# Altium PCB PCB.PcbDoc
Units mm, origin at the board's own origin, x right, y up, seen from the top; angles counter-clockwise.
Board outline 28.4 x 26.4 mm, 2 copper layers (Top Layer, Bottom Layer), stack 1.18 mm thick; 3 components, 4 nets, 28 pads, 5 vias.
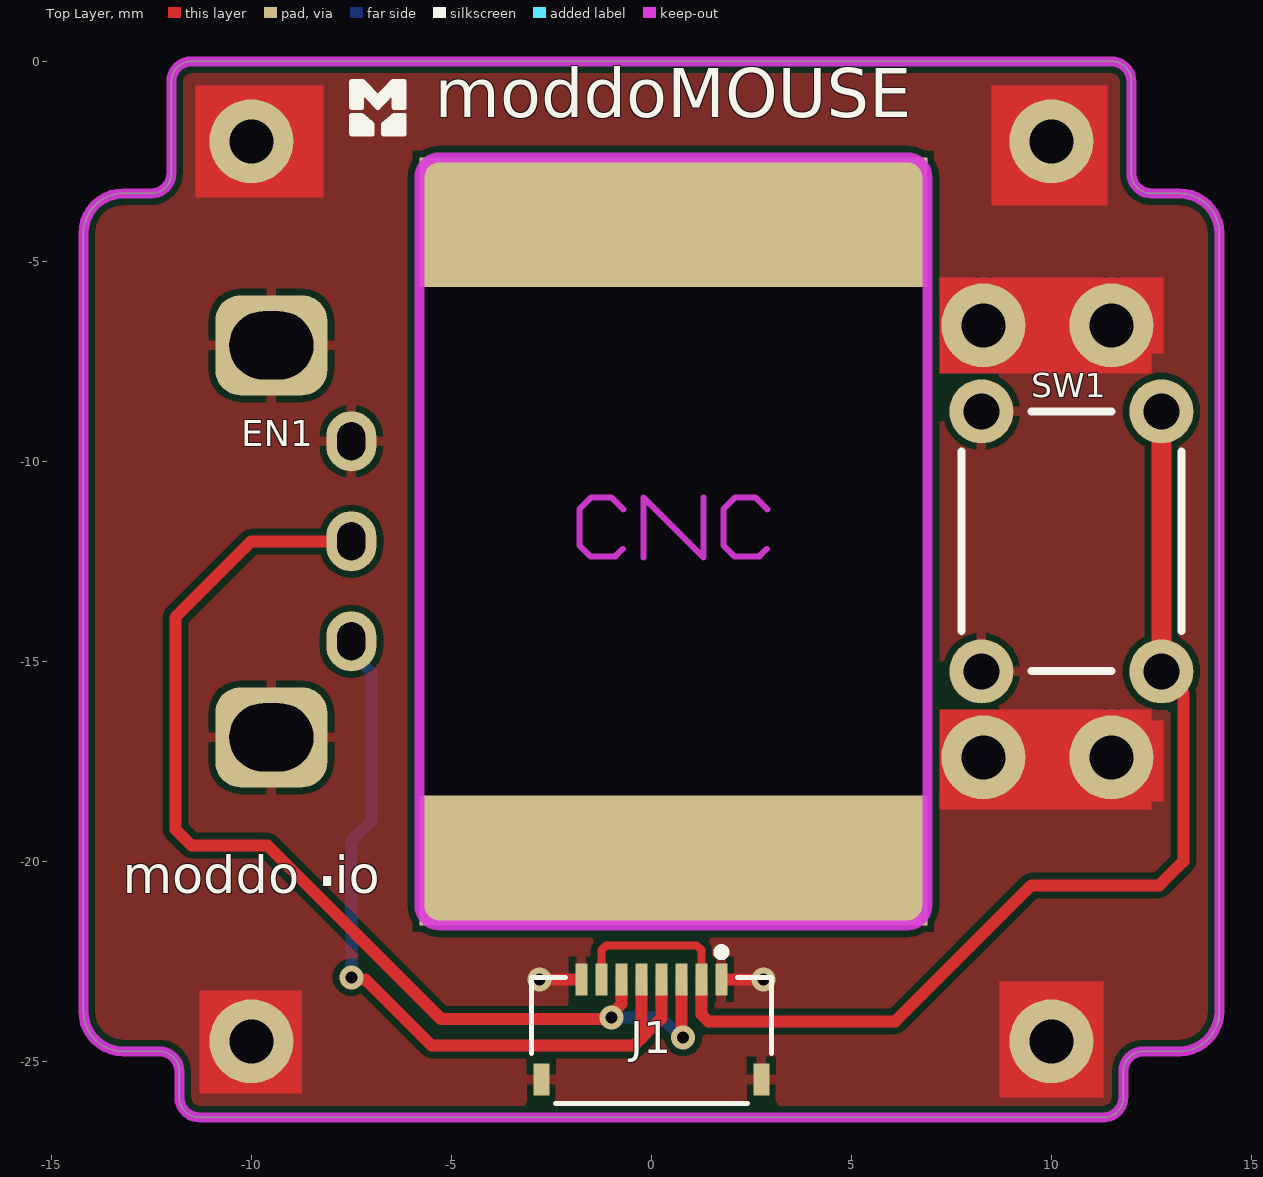
[diagram p0: Top Layer view]
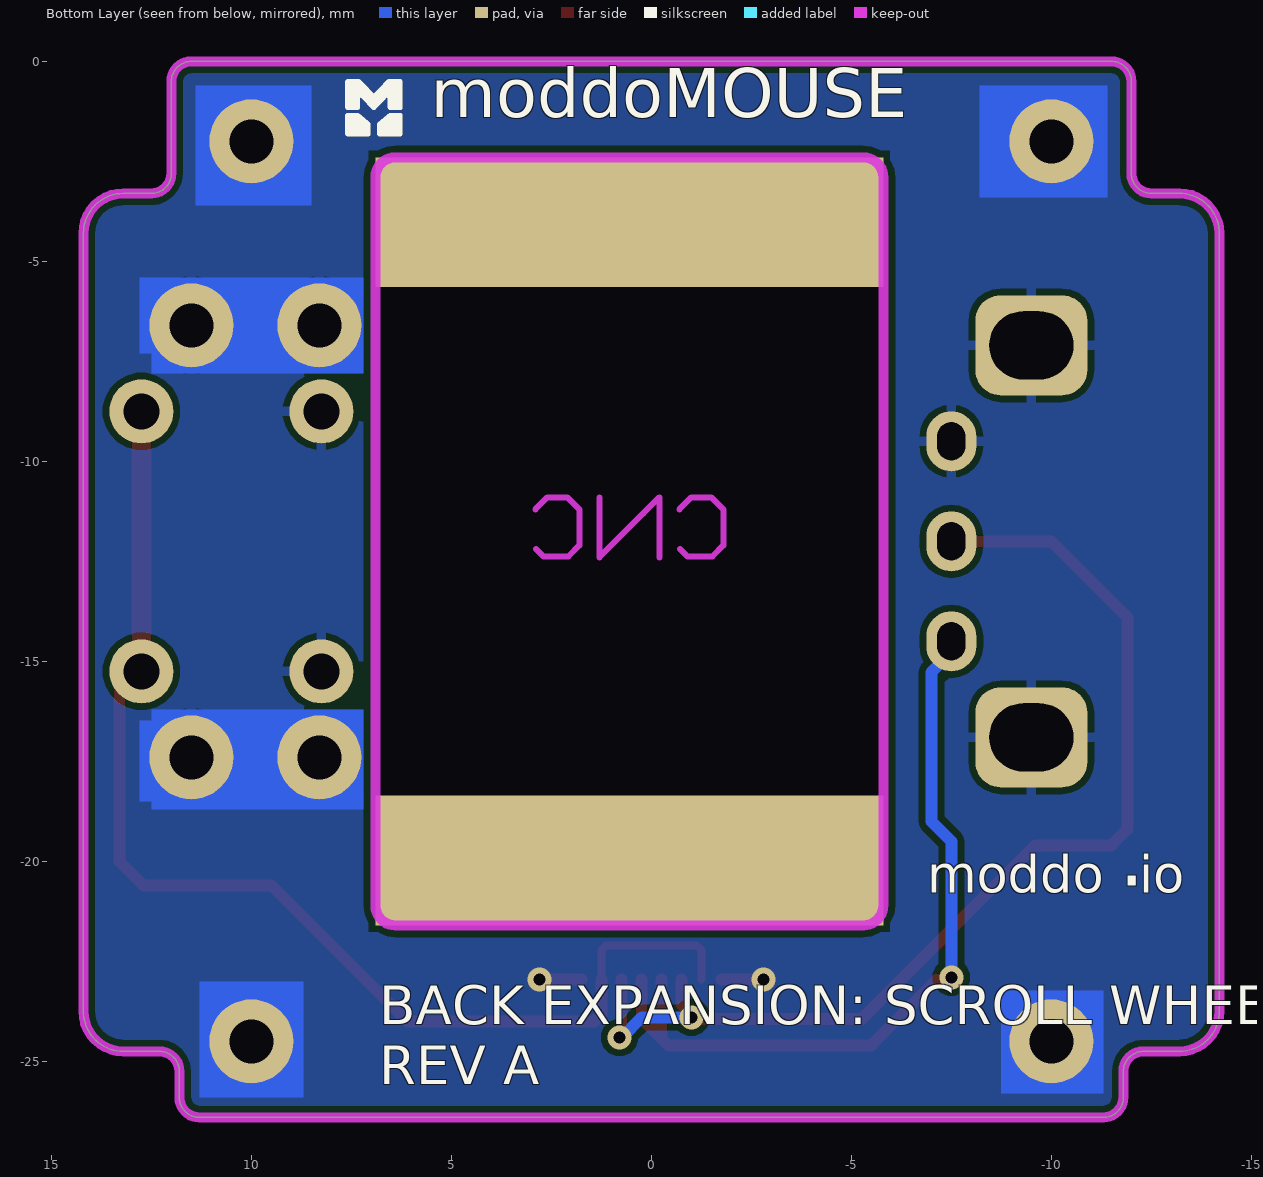
[diagram p1: Bottom Layer view, seen from below]
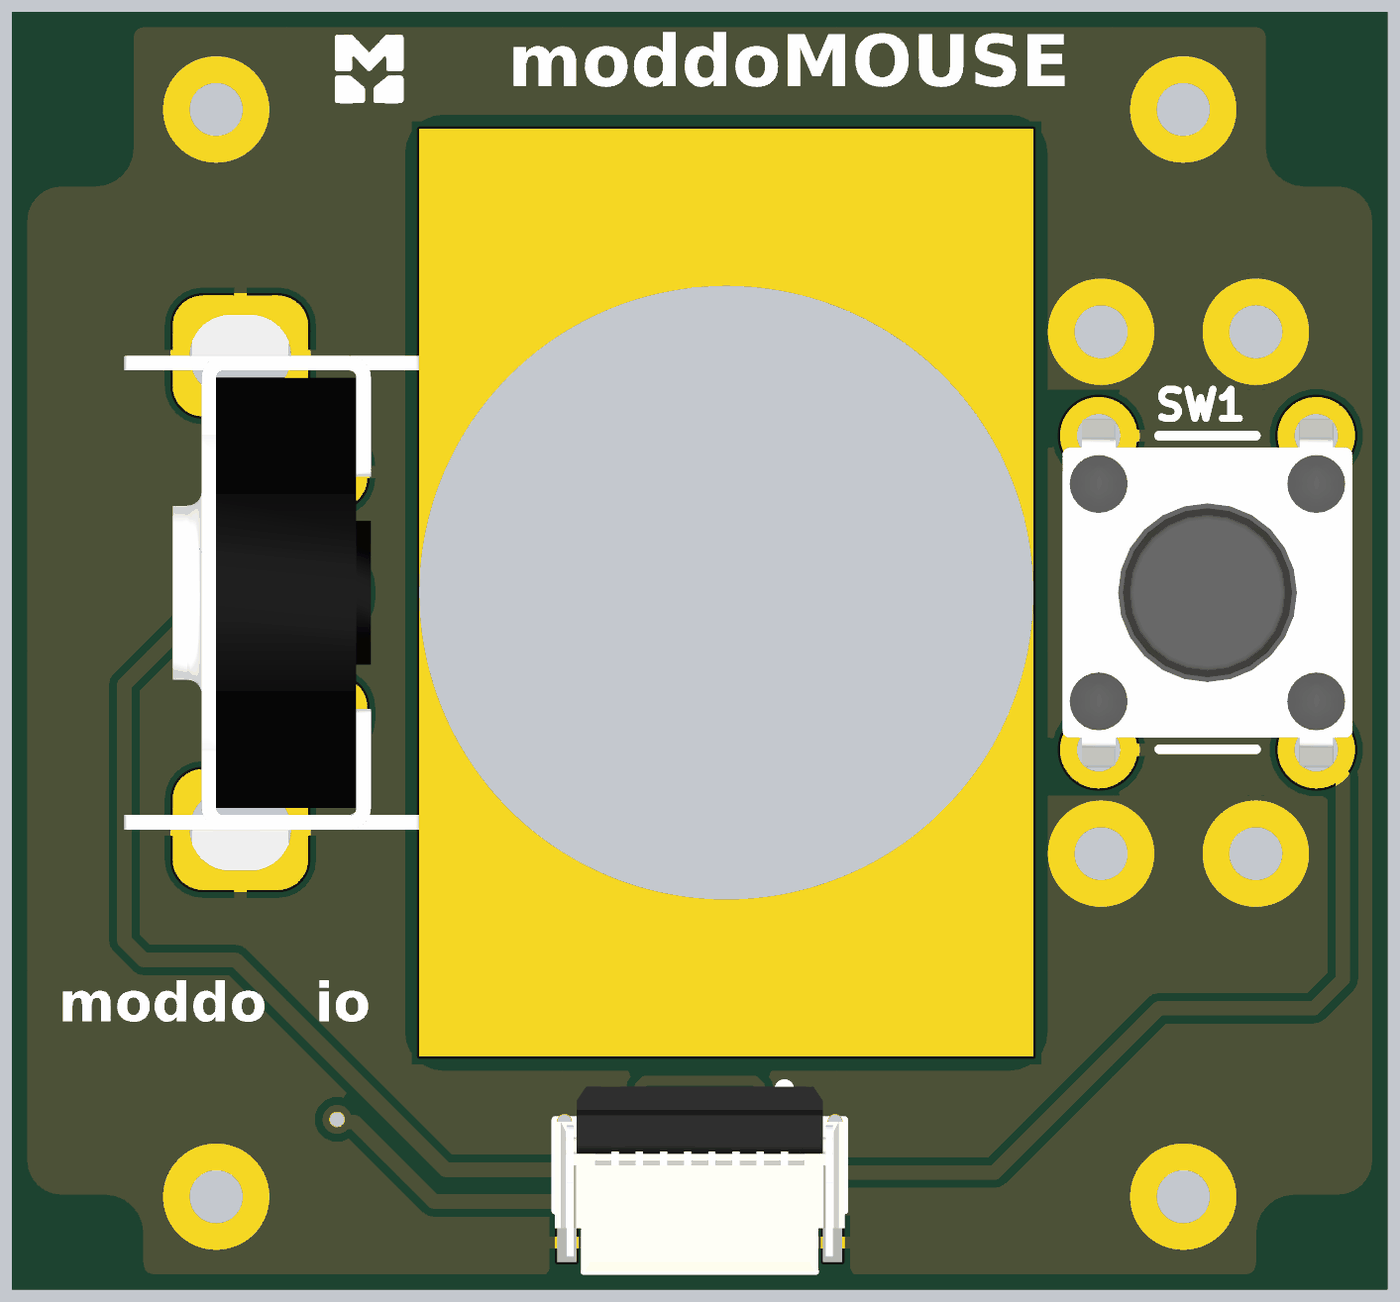
[diagram p2: 3D render of the assembled board from above, using the file's embedded part models]

## Layer stack, top to bottom
Top Solder: solder mask 0.0102, Solder Resist, Dk 3.5
Top Layer: signal copper 0.0356
Dielectric 1: dielectric 1.1086, FR-4, Dk 4.8
Bottom Layer: signal copper 0.0356
Bottom Solder: solder mask 0.0102, Solder Resist, Dk 3.5

## Board outline
-12.3,-24.75 cw(c-12.3,-25.25) -11.8,-25.25 -11.8,-25.9 ccw(c-11.3,-25.9) -11.3,-26.4 11.3,-26.4 ccw(c11.3,-25.9) 11.8,-25.9 11.8,-25.25 cw(c12.3,-25.25) 12.3,-24.75 13.2,-24.75 ccw(c13.2,-23.75) 14.2,-23.75 14.2,-4.3 ccw(c13.2,-4.3) 13.2,-3.3 12.5,-3.3 cw(c12.5,-2.8) 12,-2.8 12,-0.5 ccw(c11.5,-0.5) 11.5,0 -11.5,0 ccw(c-11.5,-0.5) -12,-0.5 -12,-2.8 cw(c-12.5,-2.8) -12.5,-3.3 -13.2,-3.3 ccw(c-13.2,-4.3) -14.2,-4.3 -14.2,-23.75 ccw(c-13.2,-23.75) -13.2,-24.75

## Design rules (kind name [scope] priority, off if disabled: settings)
BoardOutlineClearance [All] p1: gap=0.2 ignorepadtopadclearanceinfootprint=FALSE
Clearance GND_bot [InNamedPolygon('GND_bot')] p1: gap=0.2 ignorepadtopadclearanceinfootprint=FALSE
Clearance GND_top [InNamedPolygon('GND_top')] p2: gap=0.2 ignorepadtopadclearanceinfootprint=FALSE
Clearance [All] p3: gap=0.16 ignorepadtopadclearanceinfootprint=FALSE
HoleSize [All] p1: absolutevalues=TRUE maxlimit=20 minlimit=0.025 maxpercent=80.000 minpercent=20.000
MinimumSolderMaskSliver [All] p1: minsoldermaskwidth=0.05
PolygonConnect [All] p1: thpad.connectstyle=Relief thpad.reliefconductorwidth=0.254 thpad.reliefentries=4 thpad.polygonreliefangle="90 Angle" thpad.airgapwidth=0.16 smdpad.connectstyle=Relief smdpad.reliefconductorwidth=0.254 smdpad.reliefentries=4 smdpad.polygonreliefangle="90 Angle" smdpad.airgapwidth=0.16 via.connectstyle=Direct via.reliefconductorwidth=0.254 via.reliefentries=4 via.polygonreliefangle="90 Angle" via.airgapwidth=0.254
RoutingVias [All] p1: holewidth=0.3 width=0.4 viastyle="Through Hole" minholewidth=0.3 minwidth=0.4 maxholewidth=2 maxwidth=10
SilkToSilkClearance [All] p1: silktosilkclearance=0.01
SilkToSolderMaskClearance [IsPad] p1: minsilkscreentomaskgap=0.001 clearancetoexposedcopper=TRUE
SolderMaskExpansion [All] p1: expansion=0.05 istentingtop=FALSE
SupplyNets "Schematic Supply Nets_1" [InNet('GND')] p1: voltage=0.000
UnRoutedNet [All] p1: checkbadconnections=TRUE
Width [All] p1: maxlimit=2.54 minlimit=0.089 preferedwidth=0.254
25 further rules are at their usual default settings.

## Components (designator, comment, footprint, x,y, rotation, side; value= is the part's Value field where it differs from the comment)
EN1 "EC10E1220501" THROUGH_SHAFT_ENCODER_9MM -7.5,-12 r90 top
J1 "2328702-8" 2328702-8 0,-26.3 r0 top
SW1 "TS02-66-70-BK-100-SCR-D" TS02-66-70-BK-100-SCR-D 10.5,-12 r90 top

## Footprints (in the part's own frame and the unit in brackets; to place one, negate y for a bottom-side part, rotate by r counter-clockwise, add the part's x,y. Pads: shape width x height; smd on the part's side, far side on the other; paste and mask are expansions set on the pad)
2328702-8 [mm]
  rect 0.3x0.8 smd mask+0.05: 1(1.75,3.35) 2(1.25,3.35) 3(0.75,3.35) 4(0.25,3.35) 5(-0.25,3.35) 6(-0.75,3.35) 7(-1.25,3.35) 8(-1.75,3.35)
  rect 0.4x0.8 smd mask+0.05: S1(2.75,0.85) S2(-2.75,0.85)
  silkscreen extent -3,0.25 3,4.13, body extent -3,0.25 3,4.08, height 1.06
THROUGH_SHAFT_ENCODER_9MM [mm]
  oval 1.5x1.25 hole 0.7 slot 0.95 at 0 deg mask+0.05: A(-2.5,0) B(0,0) C(2.5,0)
  rrect50% 2.5x2.8 hole 1.7 slot 2.1 at 90 deg mask+0.05: MOUNT(-4.9,2) MOUNT(4.9,2)
  body extent -5.94,-1.7 5.94,4.4, height 12.6
TS02-66-70-BK-100-SCR-D [mm]
  round 1.6 hole 0.9: 1(-3.25,2.25) 2(3.25,2.25) 3(-3.25,-2.25) 4(3.25,-2.25)
  silkscreen extent -3.24,-2.75 3.25,2.75, body extent -3.6,-3 3.6,3, height 7

## Part data
EN1: "Mechanical Encoder Rotary Incremental Hollow 5mN.m Right Angle Quadrature Digital Square Wave 12PPR Through Hole PC Pin", Manufacturer="Alps Electric", Max Operating Temperature=85°C, Max Supply Voltage (DC)=5V, Min Operating Temperature=-30°C, Package Quantity=1600, Built in Switch=No, Category=Encoders, ComponentLink1Description=https://datasheet.ciiva.com/16205/ec10e-16205171.pdf?src-supplier=Onlinecomponents.com, ComponentLink1URL=https://datasheet.ciiva.com/16205/ec10e-16205171.pdf?src-supplier=Onlinecomponents.com, ComponentLink2Description=https://datasheet.ciiva.com/18154/getdatasheetpartid-652090-18154129.pdf?src-supplier=Verical, ComponentLink2URL=https://datasheet.ciiva.com/18154/getdatasheetpartid-652090-18154129.pdf?src-supplier=Verical, ComponentLink3Description=https://datasheet.ciiva.com/11807/0900766b80f4c220-11807983.pdf?src-supplier=Rs, ComponentLink3URL=https://datasheet.ciiva.com/11807/0900766b80f4c220-11807983.pdf?src-supplier=Rs, ComponentLink4Description=https://datasheet.ciiva.com/1310/1837000-1310536.pdf?src-supplier=Element14, ComponentLink4URL=https://datasheet.ciiva.com/1310/1837000-1310536.pdf?src-supplier=Element14, Hole Diameter=1.8mm, Lead Free="Lead Free", Manufacturer Part Number=EC10E1220501, Mounting Technology="Through Hole", Number of Channels=2, Packaging=Bulk, Pins=3, Pricing 1="1=1.08, 10=0.867, 25=0.832, 50=0.798, 100=0.762 (USD)", Pulses per Revolution=12, Radiation Hardening=No, RoHS=Yes, RoHS Compliant=Yes, Stock 1=3368, Supplier 1=Newark, Termination="Through Hole"
J1: "FFC/FPC Connector, 8 Contact(s), 1 Row(s), Right Angle, Solder Terminal, Natural Insulator", Actuator Color=Black, Flammability Rating="UL94 V-0", Housing Color=Natural, Manufacturer="TE Connectivity", Max Operating Temperature=85°C, Min Operating Temperature=-40°C, Operating Supply Voltage=50V, Actuator Material=Thermoplastic, Category="FFC / FPC", ComponentLink1Description=https://www.te.com/commerce/DocumentDelivery/DDEController?Action=srchrtrv&amp;DocNm=2328702&amp;DocType=Customer+Drawing&amp;DocLang=English&src-supplier=Digikey, ComponentLink1URL=https://www.te.com/commerce/DocumentDelivery/DDEController?Action=srchrtrv&amp;DocNm=2328702&amp;DocType=Customer+Drawing&amp;DocLang=English&src-supplier=Digikey, Connector System=Wire-to-Board, Contact Material="Copper Alloy", Contact Plating=Gold, Gender=Receptacle, Height=1mm, Housing Material=Thermoplastic, Length=6mm, Manufacturer Part Number=2328702-8, Mounting Technology="Surface Mount", Number of Contacts=8, Number of Positions=8, Number of Rows=1, Orientation="Right Angle", Packaging="Cut Tape", Plating=Gold, Pricing 1="28000=0.0961 (USD)", RoHS=Yes, Sealable="No (Without)", Series=-, Stock 1=56000, Supplier 1="Arrow Electronics", Supplier Part Number 1=2328702-8, Termination=Solder, Voltage Rating=50V
SW1: "Switch Tactile Spst-no 0.05A 12V", Color=Black, Contact Resistance=100mΩ, Insulation Resistance=100MΩ, Manufacturer="Same Sky", Max Current Rating=50mA, Max Operating Temperature=80°C, Max Voltage Rating (DC)=12V, Min Operating Temperature=-30°C, Operating Force=980mN, Supplier Part Number 1=2223-TS02-66-70-BK-100-SCR-D-ND, Category="Tactile Switches", ComponentLink1Description=https://datasheet.octopart.com:443/TS02-66-70-BK-100-SCR-D-Same-Sky-datasheet-183540777.pdf?src-supplier=Same+Sky, ComponentLink1URL=https://datasheet.octopart.com:443/TS02-66-70-BK-100-SCR-D-Same-Sky-datasheet-183540777.pdf?src-supplier=Same+Sky, ComponentLink2Description=https://datasheet.octopart.com:443/TS02-66-70-BK-100-SCR-D-Same-Sky-datasheet-181920466.pdf?src-supplier=Same+Sky, ComponentLink2URL=https://datasheet.octopart.com:443/TS02-66-70-BK-100-SCR-D-Same-Sky-datasheet-181920466.pdf?src-supplier=Same+Sky, ComponentLink3Description=https://datasheet.octopart.com:443/TS02-66-70-BK-100-SCR-D-Same-Sky-datasheet-181920465.pdf?src-supplier=Same+Sky, ComponentLink3URL=https://datasheet.octopart.com:443/TS02-66-70-BK-100-SCR-D-Same-Sky-datasheet-181920465.pdf?src-supplier=Same+Sky, ComponentLink4Description=https://datasheet.octopart.com:443/TS02-66-70-BK-100-SCR-D-CUI-Devices-datasheet-175928973.pdf?src-supplier=Same+Sky, ComponentLink4URL=https://datasheet.octopart.com:443/TS02-66-70-BK-100-SCR-D-CUI-Devices-datasheet-175928973.pdf?src-supplier=Same+Sky, ComponentLink5Description=https://datasheet.octopart.com:443/TS02-66-70-BK-100-SCR-D-CUI-Devices-datasheet-155929901.pdf?src-supplier=Same+Sky, ComponentLink5URL=https://datasheet.octopart.com:443/TS02-66-70-BK-100-SCR-D-CUI-Devices-datasheet-155929901.pdf?src-supplier=Same+Sky, ComponentLink6Description=https://datasheet.octopart.com:443/TS02-66-70-BK-100-SCR-D-CUI-Devices-datasheet-180438921.pdf?src-supplier=IHS, ComponentLink6URL=https://datasheet.octopart.com:443/TS02-66-70-BK-100-SCR-D-CUI-Devices-datasheet-180438921.pdf?src-supplier=IHS, ComponentLink7Description=https://datasheet.octopart.com:443/TS02-66-70-BK-100-SCR-D-Same-Sky-datasheet-182881588.pdf?src-supplier=Electro+Sonic, ComponentLink7URL=https://datasheet.octopart.com:443/TS02-66-70-BK-100-SCR-D-Same-Sky-datasheet-182881588.pdf?src-supplier=Electro+Sonic, ComponentLink8Description=https://datasheet.octopart.com:443/TS02-66-70-BK-100-SCR-D-Same-Sky-datasheet-189105763.pdf?src-supplier=Master+Electronics, ComponentLink8URL=https://datasheet.octopart.com:443/TS02-66-70-BK-100-SCR-D-Same-Sky-datasheet-189105763.pdf?src-supplier=Master+Electronics, ComponentLink9Description=https://datasheet.octopart.com:443/TS02-66-70-BK-100-SCR-D-Same-Sky-datasheet-188930957.pdf?src-supplier=TME, ComponentLink9URL=https://datasheet.octopart.com:443/TS02-66-70-BK-100-SCR-D-Same-Sky-datasheet-188930957.pdf?src-supplier=TME, ComponentLink10Description=https://octopart.com:443/opatz8j6/c1?t=HLP653kfKUnNyLRaY-FaFV0j9z0a6ljyJcAd0g2ioQ_AonTMmNTwU4IVPJnMdy9eIxVQzuuD2Zu3pf7N-gy-D9NxffwwpVrbegg9M7luCdtijzqw1HD8XYM8rr4LEKe8WthgaTICQcVnT4EdaXrmdMRbIv_syAbN7vWeLxd063wKgO5rufBQuoDPxsRiZXaF5zj2j9QuxBlB29jUVY_5bRBrvllIk-1OXrlBRrRDb8qAyP_q7sjIWfGfu8FS9OuYKaYi-jPcp7RsNayvVhYY7F0QXbvDBl27IGeqaU01JtaMs89zYB4bZG8DLFkocbUh-1087gIX4bVPJQCA7y3bbMeEPsiQw70TGyHqnWLUSeqz4Ubouw&src-supplier=Compliance+Statements, ComponentLink10URL=https://octopart.com:443/opatz8j6/c1?t=HLP653kfKUnNyLRaY-FaFV0j9z0a6ljyJcAd0g2ioQ_AonTMmNTwU4IVPJnMdy9eIxVQzuuD2Zu3pf7N-gy-D9NxffwwpVrbegg9M7luCdtijzqw1HD8XYM8rr4LEKe8WthgaTICQcVnT4EdaXrmdMRbIv_syAbN7vWeLxd063wKgO5rufBQuoDPxsRiZXaF5zj2j9QuxBlB29jUVY_5bRBrvllIk-1OXrlBRrRDb8qAyP_q7sjIWfGfu8FS9OuYKaYi-jPcp7RsNayvVhYY7F0QXbvDBl27IGeqaU01JtaMs89zYB4bZG8DLFkocbUh-1087gIX4bVPJQCA7y3bbMeEPsiQw70TGyHqnWLUSeqz4Ubouw&src-supplier=Compliance+Statements, ComponentLink11Description=https://octopart.com:443/opatz8j6/c1?t=70fxgALqLpNjG_K9rPovwjysU7jzIpdyzzOEfmqjcTOs-6ROmuQBhYmqs_ZuAcaqBIATg-po2KHNT8FFRDBRYIL0_klCBg093_lnv4m-VGCcxpH2tv7ZoDf42NqrFcaiS2p9v1HLMgL58Bvgkh7fWiFupQqqJcboTLtiFznQTeSRB_YWVsAUcqmYMh2aDwt2rP0HYapAehBpzXszozGpJmInMSOs89qtbfp5XPDIds3FFewjYOYywpW73NyliGrA4cmELQKKu9WCRcDeI_p_KBFSh0TkHYgoFAYL7Wsi2MddJKeTwre8sAVdxTEufmEfLTJTVqSle3Q2DFxEX0bFsJRtku0Ewjz7V8cehC3yuXL6NI5jn2H_FXM&src-supplier=Compliance+Statements, ComponentLink11URL=https://octopart.com:443/opatz8j6/c1?t=70fxgALqLpNjG_K9rPovwjysU7jzIpdyzzOEfmqjcTOs-6ROmuQBhYmqs_ZuAcaqBIATg-po2KHNT8FFRDBRYIL0_klCBg093_lnv4m-VGCcxpH2tv7ZoDf42NqrFcaiS2p9v1HLMgL58Bvgkh7fWiFupQqqJcboTLtiFznQTeSRB_YWVsAUcqmYMh2aDwt2rP0HYapAehBpzXszozGpJmInMSOs89qtbfp5XPDIds3FFewjYOYywpW73NyliGrA4cmELQKKu9WCRcDeI_p_KBFSh0TkHYgoFAYL7Wsi2MddJKeTwre8sAVdxTEufmEfLTJTVqSle3Q2DFxEX0bFsJRtku0Ewjz7V8cehC3yuXL6NI5jn2H_FXM&src-supplier=Compliance+Statements, ComponentLink12Description=https://octopart.com:443/opatz8j6/c1?t=0M2gUtPNxCIFKztzr0ORoQp74-qqkM508TPT7wg6m0fN_GA_OkfieEk8EIqSK9t5NbTvw4RdocQjUPrVJcY4NvfdBN--JLXOnsBa5bEMLNaIzwiYtbFg_6z_wR3zqnDTdSeF_oIuOYO8CYFrj75SMWMnab9KxghoES98oqWa6u9tO-Rmbu1W1tT6emVTSCYp7BgLb3OBYN-dQzTQZIBGhGfaphAjKsycwfMKwTeGkST-ilBj1Z_gxNVAgV-6yKJLuy_GAbFai0Kg7uavY94pLOpbiRI-h0GWb66rsUlTT5xwqO7ZyWRlLnQY9NYeXMFqEYDrJCNP-b1rzYCCJcH7sxmr3xVo_XKPUQ&src-supplier=Compliance+Statements, ComponentLink12URL=https://octopart.com:443/opatz8j6/c1?t=0M2gUtPNxCIFKztzr0ORoQp74-qqkM508TPT7wg6m0fN_GA_OkfieEk8EIqSK9t5NbTvw4RdocQjUPrVJcY4NvfdBN--JLXOnsBa5bEMLNaIzwiYtbFg_6z_wR3zqnDTdSeF_oIuOYO8CYFrj75SMWMnab9KxghoES98oqWa6u9tO-Rmbu1W1tT6emVTSCYp7BgLb3OBYN-dQzTQZIBGhGfaphAjKsycwfMKwTeGkST-ilBj1Z_gxNVAgV-6yKJLuy_GAbFai0Kg7uavY94pLOpbiRI-h0GWb66rsUlTT5xwqO7ZyWRlLnQY9NYeXMFqEYDrJCNP-b1rzYCCJcH7sxmr3xVo_XKPUQ&src-supplier=Compliance+Statements, ComponentLink13Description=https://octopart.com:443/opatz8j6/c1?t=diif9Q9lWxKVNFgYf2ypxkBIpJy_xgH8lB9SlF-sgjeEzbBCUVmT_nzSoRgXF36nPrchZjg3iSgBGugOu1kM5DFk3dZCPjGsZ2AECwKBw0yNVqZziTPdJApiVqJ2N8tp3yywOshnCqmZxG2i-lqiFfHMSfwXJbIAb0IWzMQMxGRWHhSJomd94oD279jFTGt8oizERBWbfb88NO9_Xr3EVZhRepn2f-WGygd1GS9heeHI2QHR3-nScg2II5lErYeUXOg5oJ91TW5jc1ptKnvIg9-7FjmYCEPJ7ClYA3CtivUmUoH3UgqEViyww75S0eqfJ7jiv1ohBfmjBBBnsjsMwfP_bN0qkEs5FUvu0_Goiq3pWEomZw&src-supplier=Compliance+Statements, ComponentLink13URL=https://octopart.com:443/opatz8j6/c1?t=diif9Q9lWxKVNFgYf2ypxkBIpJy_xgH8lB9SlF-sgjeEzbBCUVmT_nzSoRgXF36nPrchZjg3iSgBGugOu1kM5DFk3dZCPjGsZ2AECwKBw0yNVqZziTPdJApiVqJ2N8tp3yywOshnCqmZxG2i-lqiFfHMSfwXJbIAb0IWzMQMxGRWHhSJomd94oD279jFTGt8oizERBWbfb88NO9_Xr3EVZhRepn2f-WGygd1GS9heeHI2QHR3-nScg2II5lErYeUXOg5oJ91TW5jc1ptKnvIg9-7FjmYCEPJ7ClYA3CtivUmUoH3UgqEViyww75S0eqfJ7jiv1ohBfmjBBBnsjsMwfP_bN0qkEs5FUvu0_Goiq3pWEomZw&src-supplier=Compliance+Statements, ComponentLink14Description=https://octopart.com:443/opatz8j6/c1?t=imcCfIDy5o_ml50jtfjPxlR6DZ_wJD5zN0zQzufCnUTvUT0YJEIpXllkHao9xdejupS_czezSO7NHYOkFFzvO-KWfitz_4VyM9E57VLf2lJat0Li5JMhp_PVSZeq-2lKDWqSwTzEPRMj8I_f-Bcni8gKS6mmu2GnDZ8MMk2UfHI6ioBV2HvYNDzpuGAzvtKEZz1R2H6q5jLC2OKgZnoSEYJSrhZ-HoMyrn1bi6_ivQyBh6WR3Osn0n3mf6szmji0OW0cS32L0RTDLzbe5apsoDXB1RAJOqIijn7fzRHDOhWtDUqiBOOdw2DWMA6LC7TFGd2P5An41jYudu2603zI8PWHVSPGioqRMTziF1Fy9Kg1Zw3IXdiPQyQ&src-supplier=Compliance+Statements, ComponentLink14URL=https://octopart.com:443/opatz8j6/c1?t=imcCfIDy5o_ml50jtfjPxlR6DZ_wJD5zN0zQzufCnUTvUT0YJEIpXllkHao9xdejupS_czezSO7NHYOkFFzvO-KWfitz_4VyM9E57VLf2lJat0Li5JMhp_PVSZeq-2lKDWqSwTzEPRMj8I_f-Bcni8gKS6mmu2GnDZ8MMk2UfHI6ioBV2HvYNDzpuGAzvtKEZz1R2H6q5jLC2OKgZnoSEYJSrhZ-HoMyrn1bi6_ivQyBh6WR3Osn0n3mf6szmji0OW0cS32L0RTDLzbe5apsoDXB1RAJOqIijn7fzRHDOhWtDUqiBOOdw2DWMA6LC7TFGd2P5An41jYudu2603zI8PWHVSPGioqRMTziF1Fy9Kg1Zw3IXdiPQyQ&src-supplier=Compliance+Statements, ComponentLink15Description=https://octopart.com:443/opatz8j6/c1?t=kKijr8Z3YtJHTTjWnXb3xh0DJP5EzxeX4UFkx4TEZ6Cz0Z832s2bRldFgYZlCpaXiK9LCmfdBkdCa6SQTrNfeR21pT66xN4z56ytO83LXIFW6jqhfe0BF4PCg9LZ01M04qLlAqJjGu9g9SeA4zCDxwvuczhHHSMbXOPUkjBKcuT-covQ3TDYxKJX1WQbLINFlqNmhVdmt0nNVmCHYY5UlYZquJcZxWugtPfk0hXKeUZrRbCaVG2WVxMsTTDZa3ihWnkhx37ifFF9Olm0_Nb0GN6vgv_2MEW77TYbpXRH10yY7gT6N9FBAuGfJTCPb3AxGTSm9otgR3_KqACkaD-fKVuVVtpYMw7tLA&src-supplier=Compliance+Statements, ComponentLink15URL=https://octopart.com:443/opatz8j6/c1?t=kKijr8Z3YtJHTTjWnXb3xh0DJP5EzxeX4UFkx4TEZ6Cz0Z832s2bRldFgYZlCpaXiK9LCmfdBkdCa6SQTrNfeR21pT66xN4z56ytO83LXIFW6jqhfe0BF4PCg9LZ01M04qLlAqJjGu9g9SeA4zCDxwvuczhHHSMbXOPUkjBKcuT-covQ3TDYxKJX1WQbLINFlqNmhVdmt0nNVmCHYY5UlYZquJcZxWugtPfk0hXKeUZrRbCaVG2WVxMsTTDZa3ihWnkhx37ifFF9Olm0_Nb0GN6vgv_2MEW77TYbpXRH10yY7gT6N9FBAuGfJTCPb3AxGTSm9otgR3_KqACkaD-fKVuVVtpYMw7tLA&src-supplier=Compliance+Statements, Contact Plating=Silver, Electrical Life=100kcycles, Height=3.5mm, Housing Material="Stainless Steel", Length=6mm, Lifecycle Status=Production, Manufacturer Part Number=TS02-66-70-BK-100-SCR-D, Number of Positions=1, Pricing 1="1=0.1, 10=0.093, 25=0.0872, 100=0.0788, 250=0.07328, 500=0.0692, 1000=0.06531, 3000=0.05961, 5000=0.0572 (USD)", REACH SVHC=Yes, RoHS=Compliant, Stock 1=2978, Supplier 1=DigiKey, Terminal Material=Brass, Throw Configuration=SPST

## Free pads (board coordinates)
  round 2.1 hole 1.1: ""(-10,-24.5) ""(-10,-2) ""(8.3,-17.4) ""(8.3,-6.6) ""(10,-24.5) ""(10,-2) ""(11.5,-17.4) ""(11.5,-6.6)
  rect 12.7x19.2 hole 12.7 square unplated: ""(0.55,-12)

## Via types
v1: diameter 0.6, hole 0.3, Top Layer to Bottom Layer, tented both sides, 5 vias

## Nets (pads, with @x,y where several pads share a name; then routed paths per layer and width w, separated by ;. In a path a pad name is that pad's centre, name@x,y a point inside that pad or via, vN(x,y) a via of type N, cw(c..) or ccw(c..) an arc to the next point about the centre after c; other vN are vias at no path point)
CLICK: J1.2 J1.7 SW1.3 SW1.4 | length 30.2
  Top Layer w0.2: J1.7 -1.25,-22.217 -1.133,-22.1 1.133,-22.1 1.25,-22.217 J1.2
  Top Layer w0.3: J1.2 1.25,-23.824 1.426,-24 6.1,-24 9.5,-20.6 12.7,-20.6 13.3,-20 13.3,-15.8 SW1.3
  Top Layer w0.5: SW1.3 SW1.4
ENC_A: EN1.A J1.4 J1.5 | length 20
  Top Layer w0.3: v1(-7.5,-22.9) -7.443,-22.957 -7.143,-22.957 -6.5,-23.6 -5.5,-24.6 -0.426,-24.6 -0.25,-24.424 ; J1.5 -0.25,-24.424 ; J1.4 0.25,-23.924 -0.25,-24.424
  Bottom Layer w0.3: v1(-7.5,-22.9) -7.5,-19.5 -7,-19 -7,-15.276 -7.5,-14.776 EN1.A
ENC_B: EN1.B J1.3 J1.6 | length 27.9
  Top Layer w0.3: EN1.B -10,-12 -11.9,-13.9 -11.9,-19.2 -11.5,-19.6 -9.6,-19.6 -5.257,-23.943 -1.043,-23.943 v1(-1,-23.9) -1,-23.819 -0.75,-23.569 J1.6 ; J1.3 0.75,-24.361 v1(0.794,-24.405)
  Bottom Layer w0.3: v1(-1,-23.9) 0.239,-23.9 0.744,-24.405 v1(0.794,-24.405)
GND: EN1.C EN1.MOUNT J1.1 J1.8 J1.S1 J1.S2 pad.@8.3,-6.6 pad.@8.3,-17.4 pad.@10,-2 pad.@10,-24.5 pad.@11.5,-6.6 pad.@11.5,-17.4 pad.@-10,-2 pad.@-10,-24.5 SW1.1 SW1.2 | length 2.1
  Top Layer w0.3: v1(-2.8,-22.95) J1.8 ; J1.1 v1(2.8,-22.95)

## Polygon pours and split planes (outlines as drawn)
GND on Top Layer "GND_L01_P000" (solid, pour order 0): -12.3,-24.75 cw(c-12.3,-25.25) -11.8,-25.25 -11.8,-25.9 ccw(c-11.3,-25.9) -11.3,-26.4 11.3,-26.4 ccw(c11.3,-25.9) 11.8,-25.9 11.8,-25.25 cw(c12.3,-25.25) 12.3,-24.75 13.2,-24.75 ccw(c13.2,-23.75) 14.2,-23.75 14.2,-4.3 ccw(c13.2,-4.3) 13.2,-3.3 12.5,-3.3 cw(c12.5,-2.8) 12,-2.8 12,-0.5 ccw(c11.5,-0.5) 11.5,0 -11.5,0 ccw(c-11.5,-0.5) -12,-0.5 -12,-2.8 cw(c-12.5,-2.8) -12.5,-3.3 -13.2,-3.3 ccw(c-13.2,-4.3) -14.2,-4.3 -14.2,-23.75 ccw(c-13.2,-23.75) -13.2,-24.75
GND on Bottom Layer "GND_L02_P001" (solid, pour order 1): -12.3,-24.75 cw(c-12.3,-25.25) -11.8,-25.25 -11.8,-25.9 ccw(c-11.3,-25.9) -11.3,-26.4 11.3,-26.4 ccw(c11.3,-25.9) 11.8,-25.9 11.8,-25.25 cw(c12.3,-25.25) 12.3,-24.75 13.2,-24.75 ccw(c13.2,-23.75) 14.2,-23.75 14.2,-4.3 ccw(c13.2,-4.3) 13.2,-3.3 12.5,-3.3 cw(c12.5,-2.8) 12,-2.8 12,-0.5 ccw(c11.5,-0.5) 11.5,0 -11.5,0 ccw(c-11.5,-0.5) -12,-0.5 -12,-2.8 cw(c-12.5,-2.8) -12.5,-3.3 -13.2,-3.3 ccw(c-13.2,-4.3) -14.2,-4.3 -14.2,-23.75 ccw(c-13.2,-23.75) -13.2,-24.75

## Keep-outs
Keep-Out Layer:
  lines w0.15: -0.714,-12.186 -0.9,-12.373 -1.527,-12.373 -1.8,-12.1 -1.8,-11.2 -1.5,-10.9 -1,-10.9 -0.7,-11.2 ; -0.2,-12.4 -0.2,-10.9 0.2,-11.3 1.3,-12.4 1.3,-10.9 ; 2.886,-12.186 2.7,-12.373 2.073,-12.373 1.8,-12.1 1.8,-11.2 2.1,-10.9 2.6,-10.9 2.9,-11.2
  lines w0.254: -14.2,-23.75 ccw(c-13.2,-23.75) -13.2,-24.75 -12.3,-24.75 cw(c-12.3,-25.25) -11.8,-25.25 -11.8,-25.9 ccw(c-11.3,-25.9) -11.3,-26.4 11.3,-26.4 ccw(c11.3,-25.9) 11.8,-25.9 11.8,-25.25 cw(c12.3,-25.25) 12.3,-24.75 13.2,-24.75 ccw(c13.2,-23.75) 14.2,-23.75 14.2,-4.3 ccw(c13.2,-4.3) 13.2,-3.3 12.5,-3.3 cw(c12.5,-2.8) 12,-2.8 12,-0.5 ccw(c11.5,-0.5) 11.5,0 -11.5,0 ccw(c-11.5,-0.5) -12,-0.5 -12,-2.8 cw(c-12.5,-2.8) -12.5,-3.3 -13.2,-3.3 ccw(c-13.2,-4.3) -14.2,-4.3 -14.2,-23.75 ; -5.8,-21.1 ccw(c-5.3,-21.1) -5.3,-21.6 6.4,-21.6 ccw(c6.4,-21.1) 6.9,-21.1 6.9,-2.9 ccw(c6.4,-2.9) 6.4,-2.4 -5.3,-2.4 ccw(c-5.3,-2.9) -5.8,-2.9 -5.8,-21.1

## Other copper
Top Layer:
  rectangle net GND: 8.7,-25.9 11.3,-23
  rectangle net GND: -11.4,-3.4 -8.2,-0.6
  rectangle net GND: 8.5,-3.6 11.4,-0.6
  rectangle net GND: 12.206,-18.5 12.8,-16.48
  rectangle net GND: 12.2,-7.3 12.8,-5.4
  rectangle net GND: 7.2,-7.8 12.5,-5.4
  rectangle net GND: 7.2,-18.7 12.5,-16.2
  rectangle net GND: -11.3,-25.8 -8.737,-23.23
Bottom Layer:
  rectangle net GND: -11.3,-25.8 -8.737,-23.23
  rectangle net GND: 8.7,-25.9 11.3,-23
  rectangle net GND: 8.5,-3.6 11.4,-0.6
  rectangle net GND: -11.4,-3.4 -8.2,-0.6
  rectangle net GND: 7.2,-7.8 12.5,-5.4
  rectangle net GND: 12.2,-7.3 12.8,-5.4
  rectangle net GND: 7.2,-18.7 12.5,-16.2
  rectangle net GND: 12.206,-18.5 12.8,-16.48

## Silkscreen, mask and mechanical layers (free items; w line width, h text height)
Top Overlay:
  drawing of 3 lines, arcs and shapes, not listed
  text "moddoMOUSE" at -5.42,-1.8 h2.1
  text "moddo" at -13.211,-21.114 h1.6
  text "." at -8.411,-21.114 h2.5
  text "io" at -7.911,-21.114 h1.6
Bottom Overlay:
  drawing of 3 lines, arcs and shapes, not listed
  text "moddoMOUSE" at 5.52,-1.8 h2.1
  text "io" at -12.2,-21.1 h1.6
  text "." at -11.7,-21.1 h2.5
  text "moddo" at -6.9,-21.1 h1.6
  text "BACK EXPANSION: SCROLL WHEEL" at 6.8,-24.4 h1.65
  text "REV A" at 6.8,-25.9 h1.65